# Altium PCB RT8065.PcbDoc
Units mm, origin at the board's own origin, x right, y up, seen from the top; angles counter-clockwise.
Board outline 16.51 x 19.3 mm, 2 copper layers (Top Layer, Bottom Layer); 11 components, 9 nets, 33 pads, 24 vias.
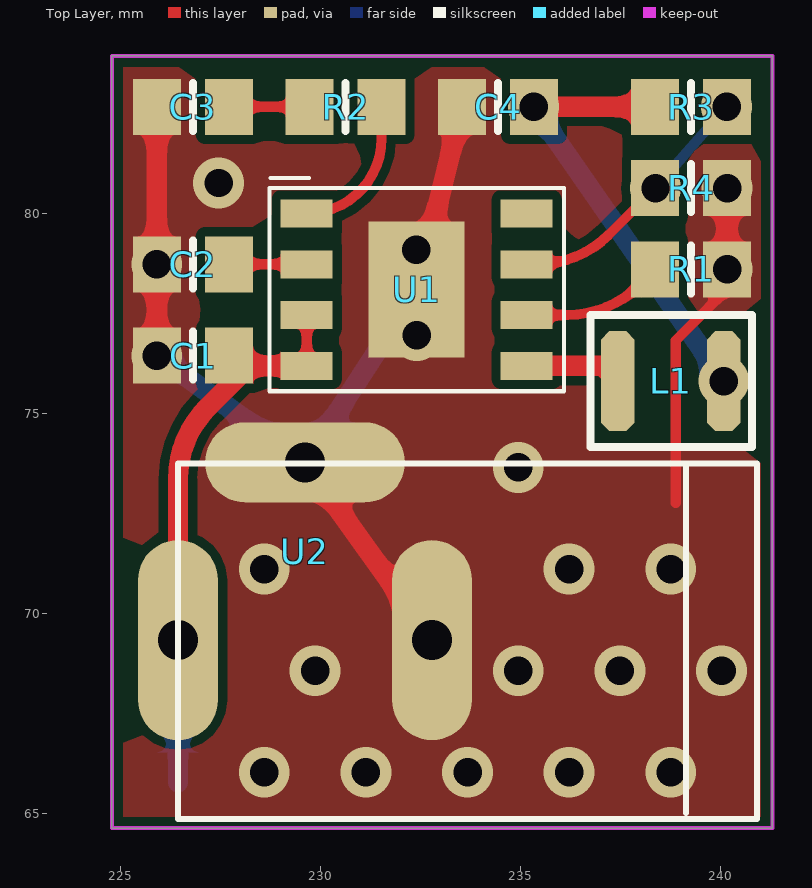
[diagram p0: Top Layer view]
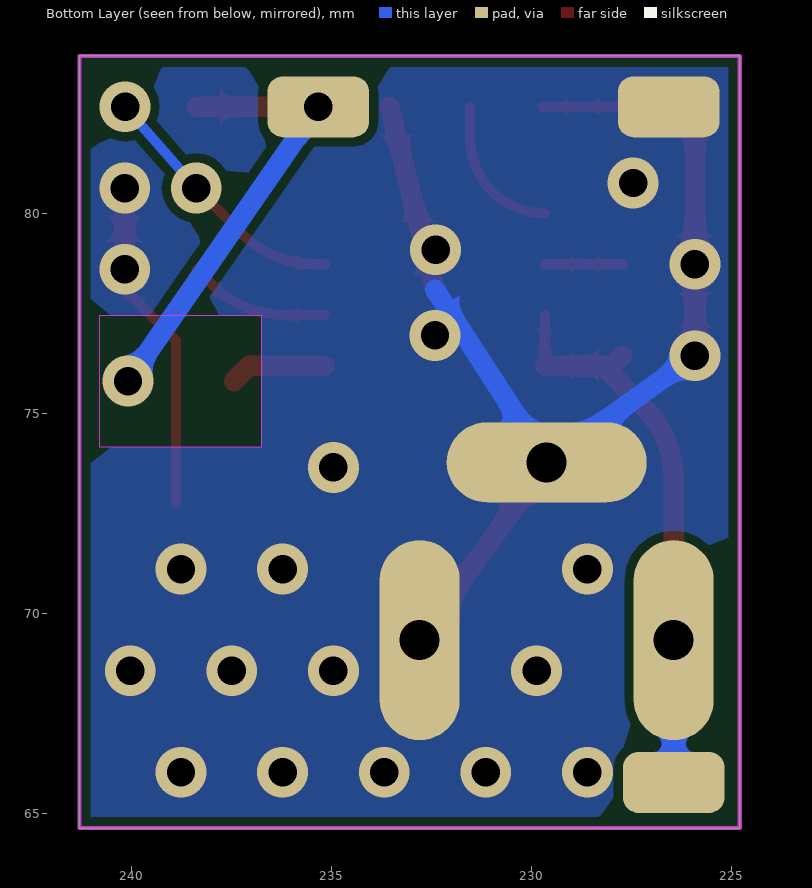
[diagram p1: Bottom Layer view, seen from below]

## Layer stack, top to bottom
Top Solder: solder mask 0.0102, Solder Resist, Dk 3.5
Top Layer: signal copper 0.0356
Dielectric 1: dielectric 0.32, FR-4, Dk 4.8
Bottom Layer: signal copper 0.0356
Bottom Solder: solder mask 0.0102, Solder Resist, Dk 3.5

## Board outline
224.79,64.643 241.3,64.643 241.3,83.947 224.79,83.947

## Design rules (kind name [scope] priority, off if disabled: settings)
Clearance [All] p1: gap=0.229 ignorepadtopadclearanceinfootprint=FALSE
HoleSize [All] p1: absolutevalues=TRUE maxlimit=2539.975 minlimit=0.305 maxpercent=80.000 minpercent=20.000
MinimumSolderMaskSliver [All] p1: minsoldermaskwidth=0
PlaneConnect [All] p1: planeconnectstyle=Direct reliefexpansion=0.508 reliefentries=4 reliefconductorwidth=0.254 reliefairgap=0.254
PolygonConnect [All] p1: connectstyle=Direct reliefconductorwidth=0.254 reliefentries=4 polygonreliefangle="90 Angle" airgapwidth=0.254
RoutingVias [All] p1: holewidth=0.711 width=1.27 viastyle="Through Hole" minholewidth=0.711 minwidth=1.27 maxholewidth=0.711 maxwidth=1.27
SilkToSilkClearance [All] p1: silktosilkclearance=0
SilkToSolderMaskClearance [IsPad] p1: minsilkscreentomaskgap=0 clearancetoexposedcopper=TRUE
SolderMaskExpansion [All] p1: expansion=0.102
Width [All] p1: maxlimit=2539.975 minlimit=0.229 preferedwidth=0.229
25 further rules are at their usual default settings.

## Components (designator, comment, footprint, x,y, rotation, side; value= is the part's Value field where it differs from the comment)
C1 "10u" 0805 226.822,76.454 r0 top
C2 "10n" 0805 226.811,78.74 r0 top
C3 "560p" 0805 226.811,82.677 r180 top
C4 "10u" 0805 234.442,82.677 r180 top
L1 "2.2u" L3X3MM 238.76,75.819 r0 top
R1 "510k" 0805 239.268,78.613 r180 top
R2 "33k" 0805 230.632,82.677 r180 top
R3 "68k" 0805 239.268,82.677 r180 top
R4 "16k" 0805 239.268,80.645 r180 top
U1 "RT8065" PSOP-8 232.41,78.105 r270 top
U2 "DCJ" JACK-2_5MM_B 233.68,69.342 r270 top

## Footprints (in the part's own frame and the unit in brackets; to place one, negate y for a bottom-side part, rotate by r counter-clockwise, add the part's x,y. Pads: shape width x height; smd on the part's side, far side on the other; paste and mask are expansions set on the pad)
0805 [mm] "Chip Resistor, Body 2.0x1.2mm, IPC Medium Density"
  rect 1.2x1.4 smd: 1(-0.9,0) 2(0.9,0)
  silkscreen extent 0,-0.6 0,0.6, body extent -1.07,-0.7 1.07,0.7, height 0.7
JACK-2_5MM_B [mm] "JACK-2_5MM_B"
  oval 5x2 / inner round 1.524 / far side oval 5x2 hole 1: 1(0,-7.239) 2(0,-0.889)
  oval 2x5 / inner round 1.524 / far side oval 2x5 hole 1: 3(-4.445,-4.064)
  silkscreen extent -4.42,-7.24 4.47,7.24
L3X3MM [mm] "L3X3MM"
  oct 0.846x2.5 smd: 1(-1.325,0) 2(1.325,0)
  Keep-Out Layer pour cut-out: -2.007,-1.651 2.032,-1.65 2.032,1.65 -2.007,1.651
  silkscreen extent -2.01,-1.65 2.03,1.65
PSOP-8 [mm]
  rect 3.4x2.4 smd: 0(0,0)
  rect 0.7x1.3 smd: 1(-1.905,-2.75) 2(-0.635,-2.75) 3(0.635,-2.75) 4(1.905,-2.75) 5(1.905,2.75) 6(0.635,2.75) 7(-0.635,2.75) 8(-1.905,2.75)
  silkscreen extent -2.79,-3.68 2.54,3.68

## Part data
C1 C2 C3 C4: library part C, "Capacitor", LatestRevisionDate=17-Jul-2002, LatestRevisionNote="Re-released for DXP Platform.", PackageDescription="Radial Cap, Thru-Hole; 2 Leads; 0.3 in Pin Spacing", PackageReference=RAD-0.3, Published=8-Jun-2000, Publisher="Altium Limited"
L1: library part L
R1 R2 R3 R4: library part R, "Resistor", LatestRevisionDate=17-Jul-2002, LatestRevisionNote="Re-released for DXP Platform.", PackageDescription="Axial Device, Thru-Hole; 2 Leads; 0.4 in Pin Spacing", PackageReference=AXIAL-0.4, Published=8-Jun-2000, Publisher="Altium Limited"

## Free pads (board coordinates)
  rrect50% 2.54x1.524 smd far side: 5(235.331,82.677) 6(226.441,65.786) 7(226.568,82.677)

## Via types
v1: diameter 1.27, hole 0.711, Top Layer to Bottom Layer, 24 vias

## Nets (pads, with @x,y where several pads share a name; then routed paths per layer and width w, separated by ;. In a path a pad name is that pad's centre, name@x,y a point inside that pad or via, vN(x,y) a via of type N, cw(c..) or ccw(c..) an arc to the next point about the centre after c; other vN are vias at no path point)
GND: C1.1 C2.1 C3.2 C4.2 pad.7 R1.1 R4.1 U1.0 U2.2 U2.3 | length 34.5
  Top Layer w0.254: 238.887,72.771 238.887,76.835 240.168,78.116 v1(240.168,78.613)
  Top Layer w0.508: v1(225.911,76.454) v1(225.911,78.74) C3.2 ; U2.3 U2.2 ; U1.0 232.641,79.04 233.045,80.67 C4.2 ; v1(240.168,78.613) v1(240.168,80.645)
  Bottom Layer w0.508: v1(225.911,76.454) U2.3 231.889,77.299 232.41,78.105
  other v1: 228.6,66.04 231.14,66.04 233.68,66.04 236.22,66.04 238.76,66.04 229.87,68.58 234.95,68.58 237.49,68.58 240.03,68.58 228.6,71.12 236.22,71.12 238.76,71.12 234.95,73.66 232.41,76.962 232.395,79.101 227.457,80.772
NetC2_2: C2.2 U1.2 | length 1.9
  Top Layer w0.254: C2.2 U1.2
NetC3_1: C3.1 R2.2 | length 2
  Top Layer w0.254: C3.1 R2.2
NetC4_1: C4.1 L1.2 pad.5 R3.2 | length 11.4
  Top Layer w0.508: v1(235.331,82.677) C4.1 R3.2
  Bottom Layer w0.508: v1(235.331,82.677) v1(240.085,75.819)
NetL1_1: L1.1 U1.5 | length 2.4
  Top Layer w0.508: U1.5 237.054,76.2 L1.1
NetR1_2: R1.2 U1.6 | length 3.6
  Top Layer w0.254: U1.6 236.173,77.47 ccw(c236.173,80.01) 237.969,78.214 R1.2
NetR2_1: R2.1 U1.1 | length 3.7
  Top Layer w0.254: U1.1 ccw(c229.66,81.882) 231.532,81.882 R2.1
NetR3_1: R3.1 R4.2 U1.7 | length 6.6
  Top Layer w0.254: U1.7 235.422,78.74 ccw(c235.422,81.28) 237.218,79.484 v1(238.379,80.645)
  Bottom Layer w0.254: v1(238.379,80.645) v1(240.157,82.677)
VCC: C1.2 pad.6 U1.3 U1.4 U2.1 | length 14.4
  Top Layer w0.254: U1.4 U1.3
  Top Layer w0.508: U2.1 226.441,73.37 cw(c228.981,73.37) 227.185,75.166 C1.2@228.219,76.2 ; C1.2 227.976,76.2 C1.2@228.219,76.2 ; U1.4 C1.2@228.219,76.2
  Bottom Layer w0.508: pad.6 U2.1
pads on no net: U1.8

## Polygon pours and split planes (outlines as drawn)
GND on Bottom Layer "GND_L02_P002" (solid, pour order 2): 224.79,83.947 241.3,83.947 241.3,64.643 224.79,64.643
GND on Top Layer "GND_L01_P004" (solid, pour order 4): 224.79,83.947 241.3,83.947 241.3,64.643 224.79,64.643

## Keep-outs
Keep-Out Layer:
  the board outline again, w0.102

## Text inside footprints (layer, text, board x,y; h text height)
L1: Mechanical 9 "1" at 237.435,75.659 h0.4; Mechanical 9 "2" at 240.085,75.659 h0.4
U2: Mechanical 9 "1" at 226.441,69.596 h0.64 r270; Mechanical 9 "3" at 229.616,74.041 h0.64 r270; Mechanical 9 "2" at 232.791,69.596 h0.64 r270